# EAGLE board led_strip_single (EAGLE 5.11)
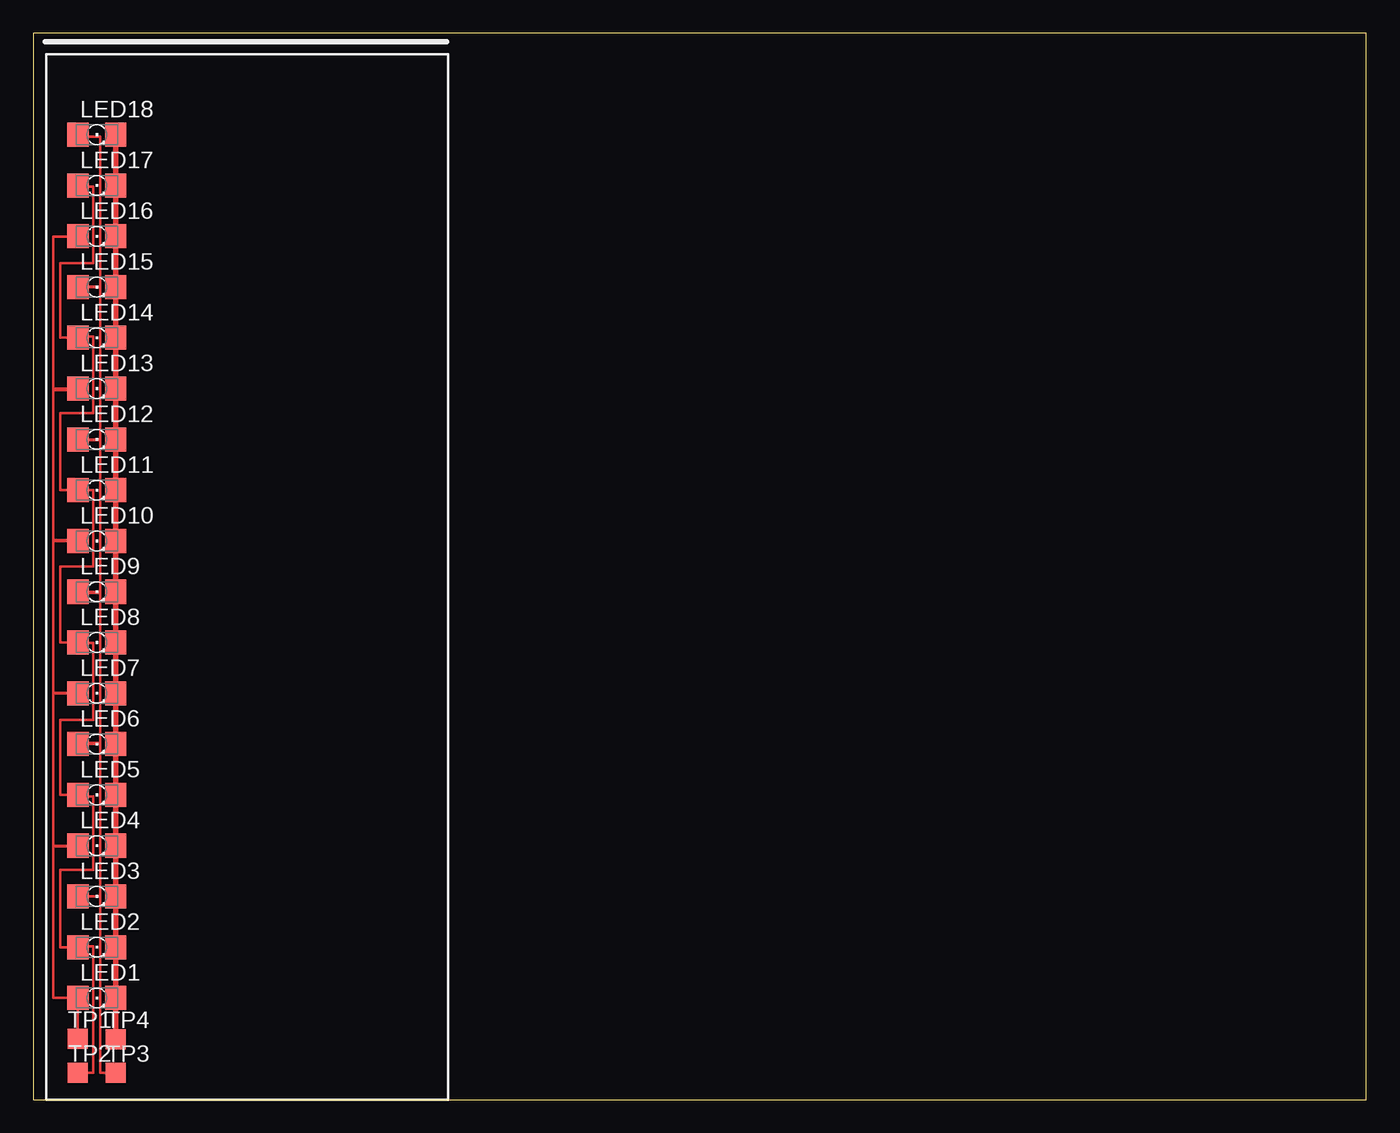
[diagram p0: board, top side]

Size 100 x 80 mm. Coordinates in mm from the lower left corner, seen from the top.
Outline: 0,0 100,0 100,80 0,80 0,0
Copper layers (1*16): Top 0.035mm / dielectric 1.5mm / Bottom 0.035mm
Design rules "default *": minimum track width 8mil, minimum drill 24mil, track to track 8mil, track to pad 8mil, pad to pad 8mil, via to via 8mil, smd to smd 8mil, copper to edge 40mil, drill to drill 8mil, minimum pad ring 10mil, minimum via ring 8mil, stop-mask expansion 4mil, vias tented up to drill 0mil, thermal gap 10mil

## Footprints (pad centres in the part's own frame; a part is rotated, then mirrored left to right if it is on the bottom)
1206 = smd 1.6 x 1.803: A -1.422,0; C 1.422,0
TP15SQ = smd 1.5 x 1.5: TP 0,0

## Placement (x,y rotation side)
LED1  1206  [1206]  4.76,7.62 0 top
LED2  1206  [1206]  4.76,11.43 0 top
LED3  1206  [1206]  4.76,15.24 0 top
LED4  1206  [1206]  4.76,19.05 0 top
LED5  1206  [1206]  4.76,22.86 0 top
LED6  1206  [1206]  4.76,26.67 0 top
LED7  1206  [1206]  4.76,30.48 0 top
LED8  1206  [1206]  4.76,34.29 0 top
LED9  1206  [1206]  4.76,38.1 0 top
LED10  1206  [1206]  4.76,41.91 0 top
LED11  1206  [1206]  4.76,45.72 0 top
LED12  1206  [1206]  4.76,49.53 0 top
LED13  1206  [1206]  4.76,53.34 0 top
LED14  1206  [1206]  4.76,57.15 0 top
LED15  1206  [1206]  4.76,60.96 0 top
LED16  1206  [1206]  4.76,64.77 0 top
LED17  1206  [1206]  4.76,68.58 0 top
LED18  1206  [1206]  4.76,72.39 0 top
TP1  1.1  [TP15SQ]  3.33,4.54 0 top
TP2  1.2  [TP15SQ]  3.34,2 0 top
TP3  1.3  [TP15SQ]  6.2,1.99 0 top
TP4  1.4  [TP15SQ]  6.18,4.53 0 top

## Library data of the parts
LED1-LED18 = led
TP1-TP4 = testpad

## Nets
LED1.5: LED1.A LED4.A LED7.A LED10.A LED13.A LED16.A TP1.TP
LED1.6: LED2.A LED5.A LED8.A LED11.A LED14.A LED17.A TP2.TP
LED1.7: LED3.A LED6.A LED9.A LED12.A LED15.A LED18.A TP3.TP
LED1.8: LED1.C LED2.C LED3.C LED4.C LED5.C LED6.C LED7.C LED8.C LED9.C LED10.C LED11.C LED12.C LED13.C LED14.C LED15.C LED16.C LED17.C LED18.C TP4.TP

## Tracks (layer width: path | path; a pad name or v marks a point on that pad's centre or on a via)
LED1.5
  Top 0.203: TP1.TP 3.34,4.54 LED1.A 1.5,7.62 1.5,19 3.34,19 LED4.A 1.5,19.05 1.5,30.48 | 1.5,30.5 3.34,30.5 LED7.A 1.5,30.48 | 1.5,30.48 1.5,30.5 | 1.5,30.5 1.5,41.91 | 1.5,42 3.34,42 LED10.A 1.5,41.91 | 1.5,41.91 1.5,42 | 1.5,42 1.5,53.25 3.34,53.25 LED13.A 1.5,53.34 1.5,64.75 3.34,64.75 LED16.A
LED1.6
  Top 0.203: TP2.TP 4.5,2 | 4.5,2 | 4.5,2 4.5,11.5 3.34,11.5 LED2.A 2,11.43 2,17.25 4.5,17.25 4.5,22.75 3.34,22.75 LED5.A 2,22.86 2,28.5 4.5,28.5 4.5,34.25 3.34,34.25 LED8.A 2,34.29 2,40 4.5,40 4.5,45.75 3.34,45.75 LED11.A 2,45.72 2,51.5 4.5,51.5 4.5,57.25 3.34,57.25 LED14.A 2,57.15 2,62.75 4.5,62.75 4.5,68.5 3.34,68.5 LED17.A
LED1.7
  Top 0.203: TP3.TP 5,1.99 5,15.25 LED3.A 5,15.24 5,26.75 3.34,26.75 LED6.A 5,26.67 5,38 3.34,38 LED9.A 5,38.1 5,49.5 3.34,49.5 LED12.A 5,49.53 5,61 3.34,61 LED15.A 5,60.96 5,72.25 3.34,72.25 LED18.A
LED1.8
  Top 0.406: LED18.C LED17.C LED16.C LED15.C LED14.C LED13.C LED12.C LED11.C LED10.C LED9.C LED8.C LED7.C LED6.C LED5.C LED4.C LED3.C LED2.C LED1.C TP4.TP